# Altium PCB PCB1.PcbDoc (part 1 of 2)
Units mm, origin at the board's own origin, x right, y up, seen from the top; angles counter-clockwise.
Board outline 25 x 30 mm, 2 copper layers (Top Layer, Bottom Layer); 264 components, 8 nets, 720 pads, 0 vias.
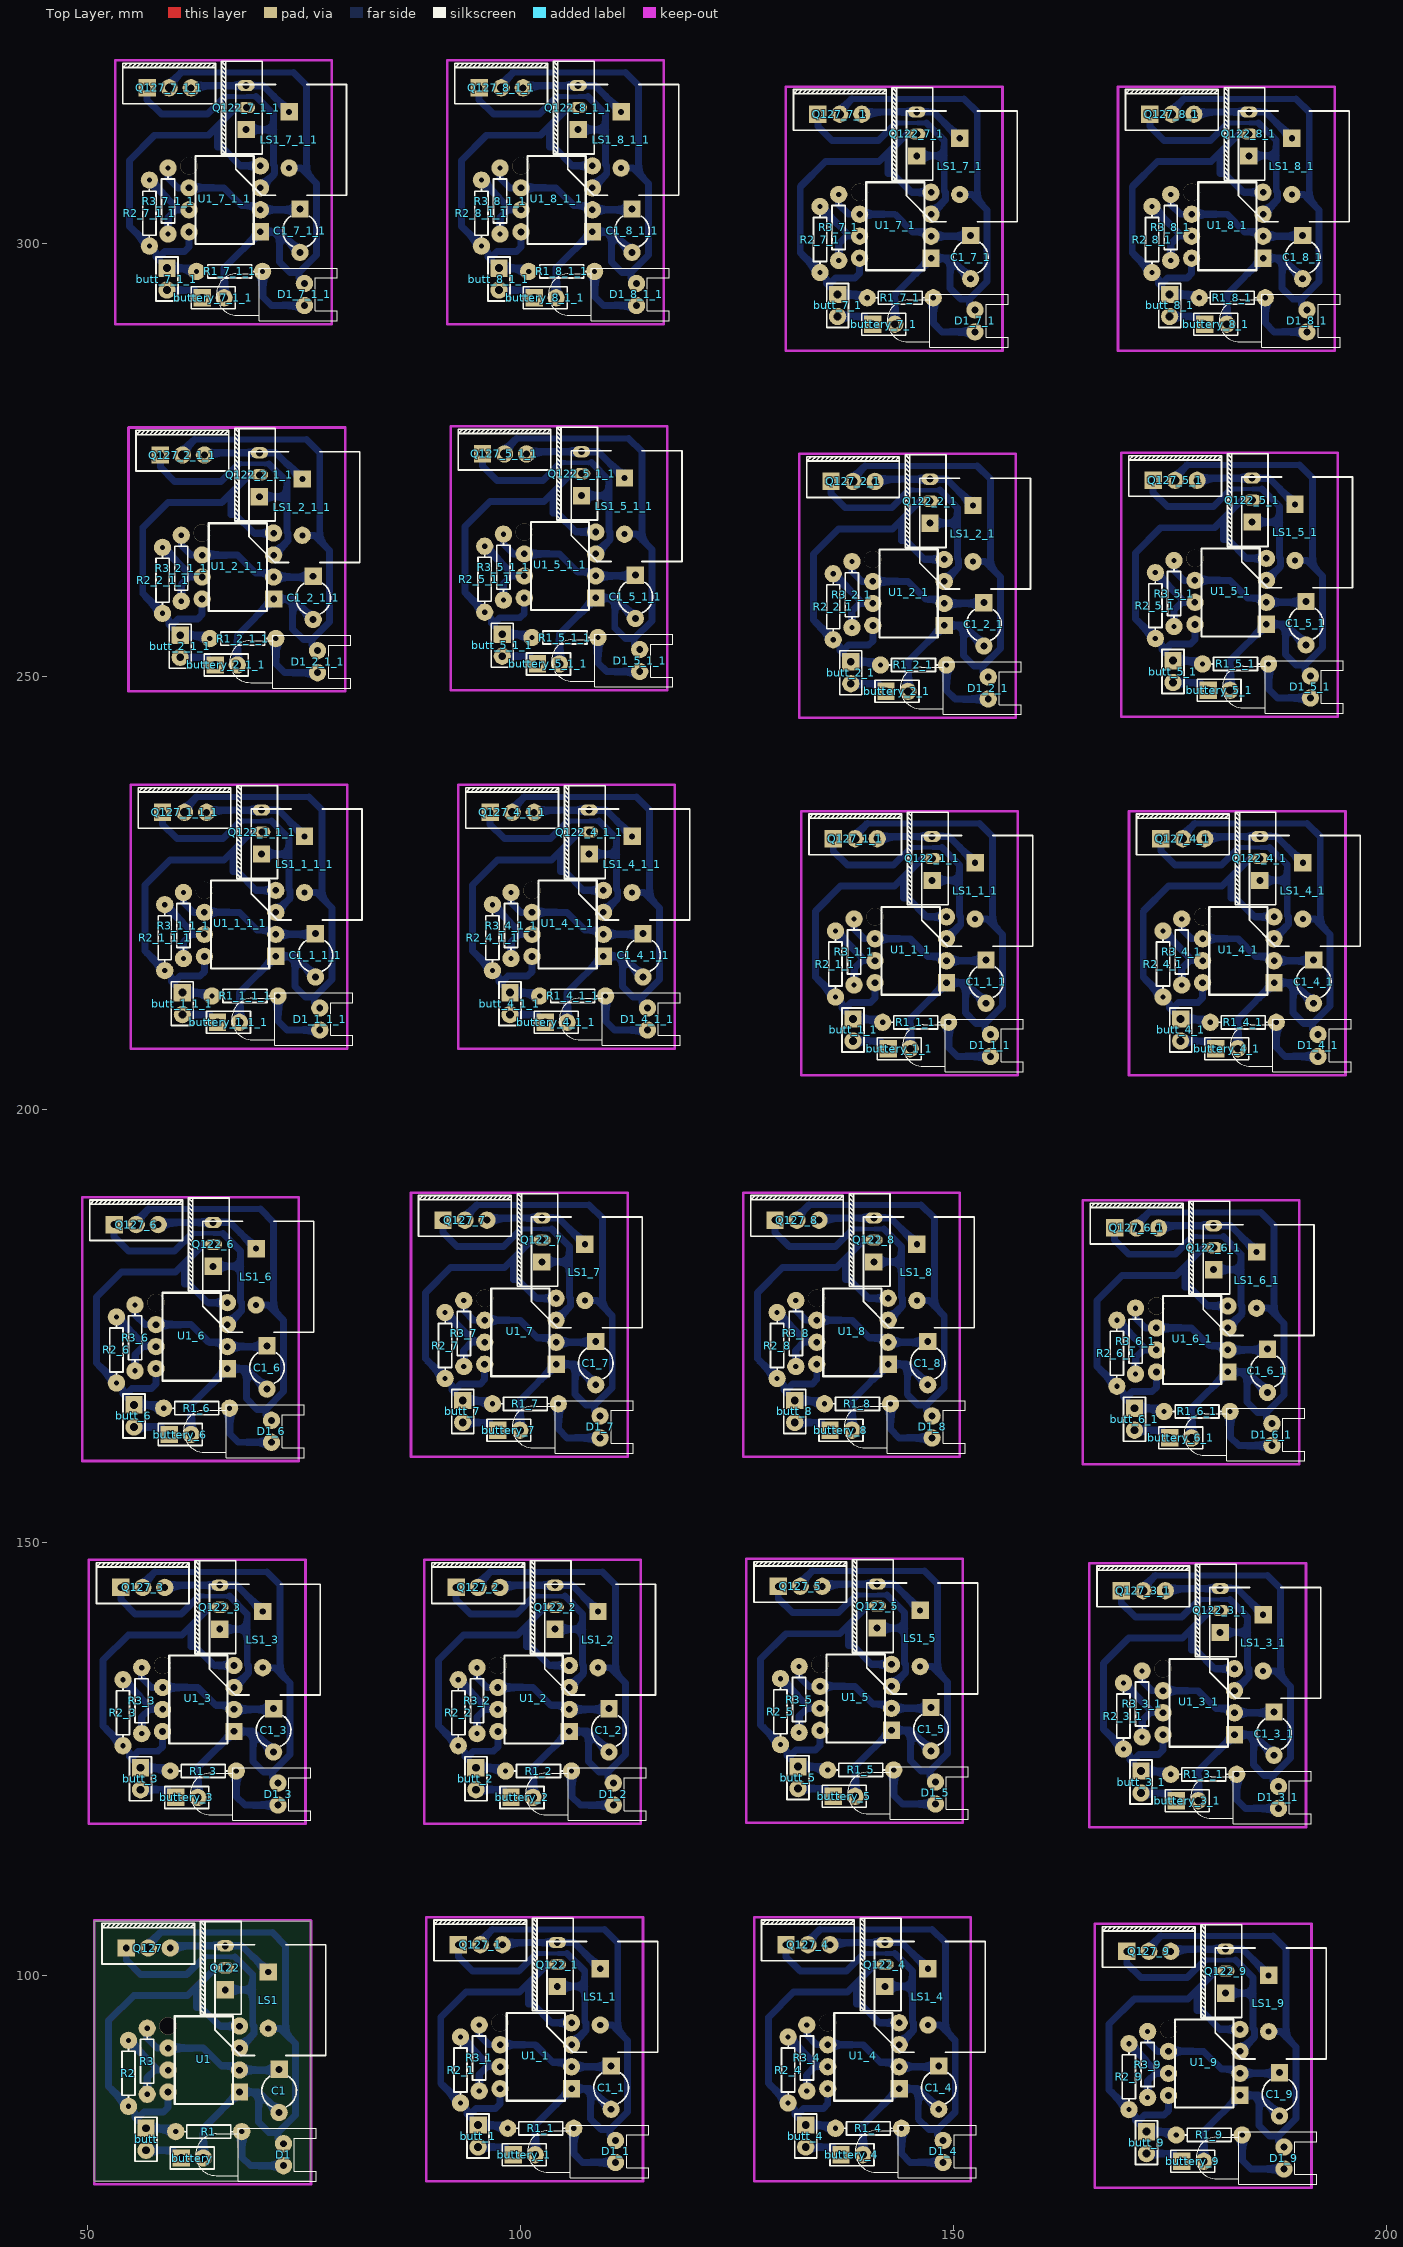
[diagram p0: Top Layer view]
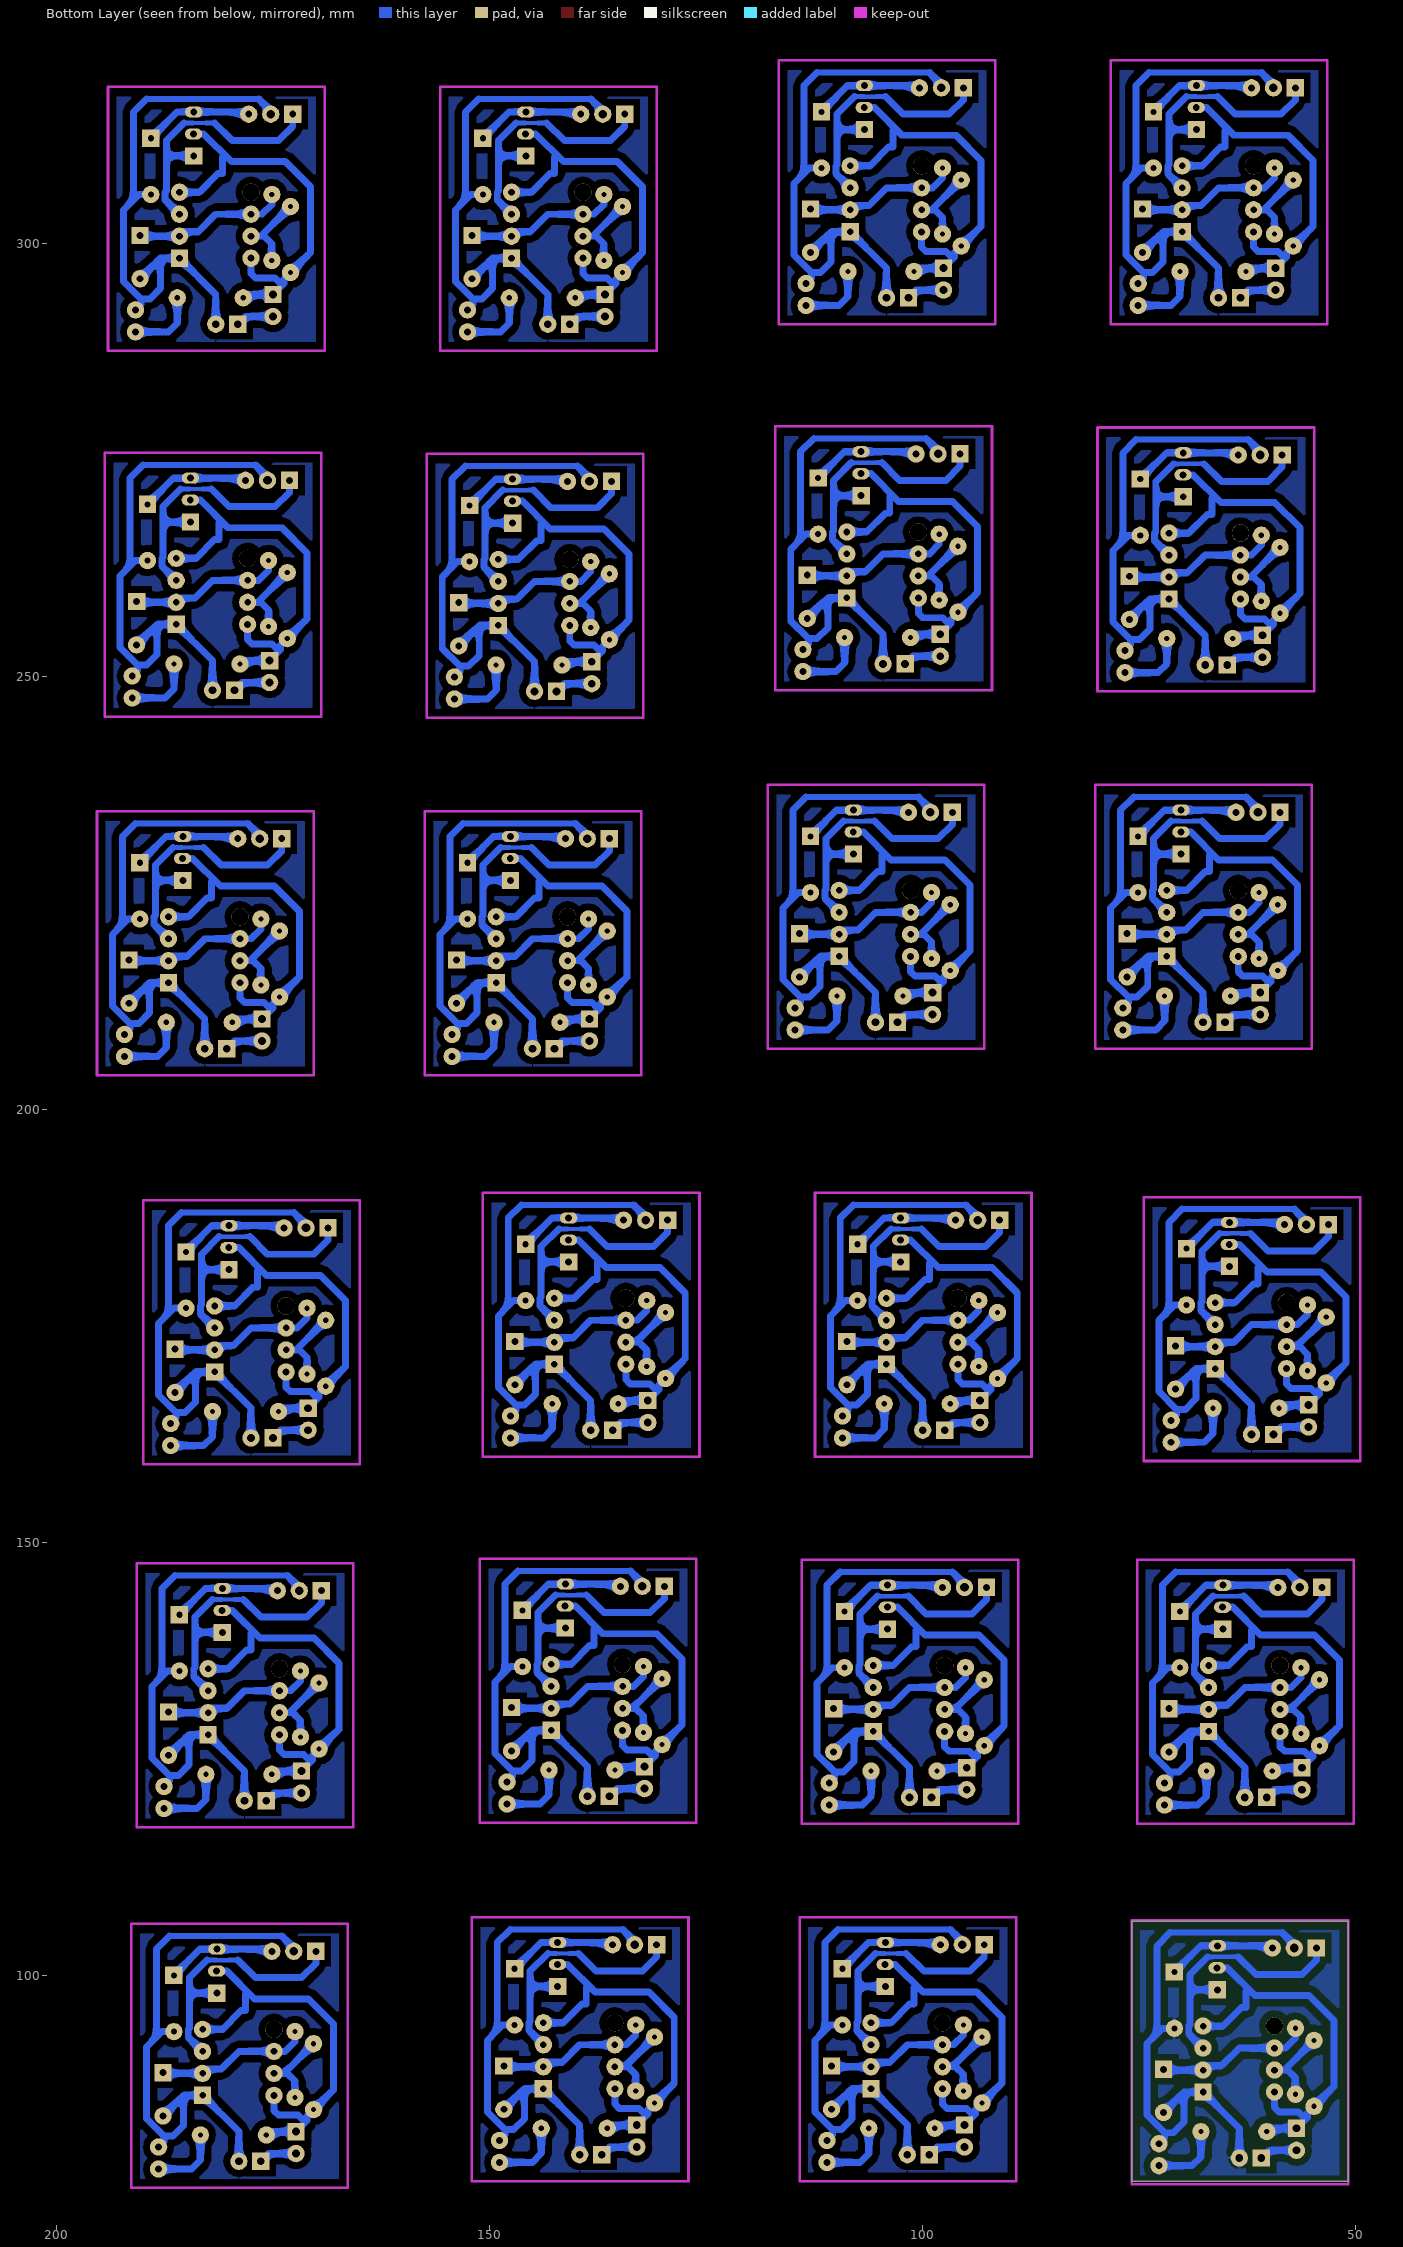
[diagram p1: Bottom Layer view, seen from below]

## Layer stack, top to bottom
Top Solder: solder mask 0.0102, Solder Resist, Dk 3.5
Top Layer: signal copper 0.0356
Dielectric 1: dielectric 0.32, FR-4, Dk 4.8
Bottom Layer: signal copper 0.0356
Bottom Solder: solder mask 0.0102, Solder Resist, Dk 3.5

## Board outline
50.8,76.2 75.8,76.2 75.8,106.2 50.8,106.2

## Design rules (kind name [scope] priority, off if disabled: settings)
Clearance [All] p1: gap=0.8
PolygonConnect [All] p1: connectstyle=Relief reliefconductorwidth=0.254 reliefentries=4 polygonreliefangle="90 Angle" airgapwidth=0.254
RoomDefinition Sheet1 [InComponentClass('Sheet1')] p1: confinementstyle=ConfineIn formatcopy=TRUE lockcomponents=FALSE outline 0,0 50.8,0 50.8,25.4 0,25.4
RoutingVias [All] p1: holewidth=0.8 width=2 viastyle="Through Hole" minholewidth=0.711 minwidth=1.27 maxholewidth=0.711 maxwidth=1.27
SolderMaskExpansion [All] p1: expansion=0.102
UnpouredPolygon [All] p1: allowunpoured=FALSE
Width [All] p1: maxlimit=0.8 minlimit=0.8 preferedwidth=0.8
29 further rules are at their usual default settings.

## Classes and differential pairs
component class Sheet1: butt buttery C1 D1 LS1 Q122 Q127 R1 R2 R3 U1

## Components (designator, comment, footprint, x,y, rotation, side; value= is the part's Value field where it differs from the comment)
butt "Header 2" HDR1X2 56.769,82.296 r270 top
butt_1 "Header 2" HDR1X2 95.123,82.677 r270 top (schematic designator butt)
butt_1_1 "Header 2" HDR1X2 138.43,210.439 r270 top (schematic designator butt)
butt_1_1_1 "Header 2" HDR1X2 60.96,213.487 r270 top (schematic designator butt)
butt_2 "Header 2" HDR1X2 94.869,123.952 r270 top (schematic designator butt)
butt_2_1 "Header 2" HDR1X2 138.176,251.714 r270 top (schematic designator butt)
butt_2_1_1 "Header 2" HDR1X2 60.706,254.762 r270 top (schematic designator butt)
butt_3 "Header 2" HDR1X2 56.134,123.952 r270 top (schematic designator butt)
butt_3_1 "Header 2" HDR1X2 171.704,123.571 r270 top (schematic designator butt)
butt_4 "Header 2" HDR1X2 132.969,82.677 r270 top (schematic designator butt)
butt_4_1 "Header 2" HDR1X2 176.276,210.439 r270 top (schematic designator butt)
butt_4_1_1 "Header 2" HDR1X2 98.806,213.487 r270 top (schematic designator butt)
butt_5 "Header 2" HDR1X2 132.08,124.079 r270 top (schematic designator butt)
butt_5_1 "Header 2" HDR1X2 175.387,251.841 r270 top (schematic designator butt)
butt_5_1_1 "Header 2" HDR1X2 97.917,254.889 r270 top (schematic designator butt)
butt_6 "Header 2" HDR1X2 55.372,165.862 r270 top (schematic designator butt)
butt_6_1 "Header 2" HDR1X2 170.942,165.481 r270 top (schematic designator butt)
butt_7 "Header 2" HDR1X2 93.345,166.37 r270 top (schematic designator butt)
butt_7_1 "Header 2" HDR1X2 136.652,294.132 r270 top (schematic designator butt)
butt_7_1_1 "Header 2" HDR1X2 59.182,297.18 r270 top (schematic designator butt)
butt_8 "Header 2" HDR1X2 131.699,166.37 r270 top (schematic designator butt)
butt_8_1 "Header 2" HDR1X2 175.006,294.132 r270 top (schematic designator butt)
butt_8_1_1 "Header 2" HDR1X2 97.536,297.18 r270 top (schematic designator butt)
butt_9 "Header 2" HDR1X2 172.339,81.915 r270 top (schematic designator butt)
buttery "Header 2" HDR1X2 60.833,78.867 r0 top
buttery_1 "Header 2" HDR1X2 99.187,79.248 r0 top (schematic designator buttery)
buttery_1_1 "Header 2" HDR1X2 142.494,207.01 r0 top (schematic designator buttery)
buttery_1_1_1 "Header 2" HDR1X2 65.024,210.058 r0 top (schematic designator buttery)
buttery_2 "Header 2" HDR1X2 98.933,120.523 r0 top (schematic designator buttery)
buttery_2_1 "Header 2" HDR1X2 142.24,248.285 r0 top (schematic designator buttery)
buttery_2_1_1 "Header 2" HDR1X2 64.77,251.333 r0 top (schematic designator buttery)
buttery_3 "Header 2" HDR1X2 60.198,120.523 r0 top (schematic designator buttery)
buttery_3_1 "Header 2" HDR1X2 175.768,120.142 r0 top (schematic designator buttery)
buttery_4 "Header 2" HDR1X2 137.033,79.248 r0 top (schematic designator buttery)
buttery_4_1 "Header 2" HDR1X2 180.34,207.01 r0 top (schematic designator buttery)
buttery_4_1_1 "Header 2" HDR1X2 102.87,210.058 r0 top (schematic designator buttery)
buttery_5 "Header 2" HDR1X2 136.144,120.65 r0 top (schematic designator buttery)
buttery_5_1 "Header 2" HDR1X2 179.451,248.412 r0 top (schematic designator buttery)
buttery_5_1_1 "Header 2" HDR1X2 101.981,251.46 r0 top (schematic designator buttery)
buttery_6 "Header 2" HDR1X2 59.436,162.433 r0 top (schematic designator buttery)
buttery_6_1 "Header 2" HDR1X2 175.006,162.052 r0 top (schematic designator buttery)
buttery_7 "Header 2" HDR1X2 97.409,162.941 r0 top (schematic designator buttery)
buttery_7_1 "Header 2" HDR1X2 140.716,290.703 r0 top (schematic designator buttery)
buttery_7_1_1 "Header 2" HDR1X2 63.246,293.751 r0 top (schematic designator buttery)
buttery_8 "Header 2" HDR1X2 135.763,162.941 r0 top (schematic designator buttery)
buttery_8_1 "Header 2" HDR1X2 179.07,290.703 r0 top (schematic designator buttery)
buttery_8_1_1 "Header 2" HDR1X2 101.6,293.751 r0 top (schematic designator buttery)
buttery_9 "Header 2" HDR1X2 176.403,78.486 r0 top (schematic designator buttery)
C1 "Cap2" CAPR5-4X5 72.136,86.614 r270 top
C1_1 "Cap2" CAPR5-4X5 110.49,86.995 r270 top (schematic designator C1)
C1_1_1 "Cap2" CAPR5-4X5 153.797,214.757 r270 top (schematic designator C1)
C1_1_1_1 "Cap2" CAPR5-4X5 76.327,217.805 r270 top (schematic designator C1)
C1_2 "Cap2" CAPR5-4X5 110.236,128.27 r270 top (schematic designator C1)
C1_2_1 "Cap2" CAPR5-4X5 153.543,256.032 r270 top (schematic designator C1)
C1_2_1_1 "Cap2" CAPR5-4X5 76.073,259.08 r270 top (schematic designator C1)
C1_3 "Cap2" CAPR5-4X5 71.501,128.27 r270 top (schematic designator C1)
C1_3_1 "Cap2" CAPR5-4X5 187.071,127.889 r270 top (schematic designator C1)
C1_4 "Cap2" CAPR5-4X5 148.336,86.995 r270 top (schematic designator C1)
C1_4_1 "Cap2" CAPR5-4X5 191.643,214.757 r270 top (schematic designator C1)
C1_4_1_1 "Cap2" CAPR5-4X5 114.173,217.805 r270 top (schematic designator C1)
C1_5 "Cap2" CAPR5-4X5 147.447,128.397 r270 top (schematic designator C1)
C1_5_1 "Cap2" CAPR5-4X5 190.754,256.159 r270 top (schematic designator C1)
C1_5_1_1 "Cap2" CAPR5-4X5 113.284,259.207 r270 top (schematic designator C1)
C1_6 "Cap2" CAPR5-4X5 70.739,170.18 r270 top (schematic designator C1)
C1_6_1 "Cap2" CAPR5-4X5 186.309,169.799 r270 top (schematic designator C1)
C1_7 "Cap2" CAPR5-4X5 108.712,170.688 r270 top (schematic designator C1)
C1_7_1 "Cap2" CAPR5-4X5 152.019,298.45 r270 top (schematic designator C1)
C1_7_1_1 "Cap2" CAPR5-4X5 74.549,301.498 r270 top (schematic designator C1)
C1_8 "Cap2" CAPR5-4X5 147.066,170.688 r270 top (schematic designator C1)
C1_8_1 "Cap2" CAPR5-4X5 190.373,298.45 r270 top (schematic designator C1)
C1_8_1_1 "Cap2" CAPR5-4X5 112.903,301.498 r270 top (schematic designator C1)
C1_9 "Cap2" CAPR5-4X5 187.706,86.233 r270 top (schematic designator C1)
D1 "LED0" LED-0 72.644,79.248 r270 top
D1_1 "LED0" LED-0 110.998,79.629 r270 top (schematic designator D1)
D1_1_1 "LED0" LED-0 154.305,207.391 r270 top (schematic designator D1)
D1_1_1_1 "LED0" LED-0 76.835,210.439 r270 top (schematic designator D1)
D1_2 "LED0" LED-0 110.744,120.904 r270 top (schematic designator D1)
D1_2_1 "LED0" LED-0 154.051,248.666 r270 top (schematic designator D1)
D1_2_1_1 "LED0" LED-0 76.581,251.714 r270 top (schematic designator D1)
D1_3 "LED0" LED-0 72.009,120.904 r270 top (schematic designator D1)
D1_3_1 "LED0" LED-0 187.579,120.523 r270 top (schematic designator D1)
D1_4 "LED0" LED-0 148.844,79.629 r270 top (schematic designator D1)
D1_4_1 "LED0" LED-0 192.151,207.391 r270 top (schematic designator D1)
D1_4_1_1 "LED0" LED-0 114.681,210.439 r270 top (schematic designator D1)
D1_5 "LED0" LED-0 147.955,121.031 r270 top (schematic designator D1)
D1_5_1 "LED0" LED-0 191.262,248.793 r270 top (schematic designator D1)
D1_5_1_1 "LED0" LED-0 113.792,251.841 r270 top (schematic designator D1)
D1_6 "LED0" LED-0 71.247,162.814 r270 top (schematic designator D1)
D1_6_1 "LED0" LED-0 186.817,162.433 r270 top (schematic designator D1)
D1_7 "LED0" LED-0 109.22,163.322 r270 top (schematic designator D1)
D1_7_1 "LED0" LED-0 152.527,291.084 r270 top (schematic designator D1)
D1_7_1_1 "LED0" LED-0 75.057,294.132 r270 top (schematic designator D1)
D1_8 "LED0" LED-0 147.574,163.322 r270 top (schematic designator D1)
D1_8_1 "LED0" LED-0 190.881,291.084 r270 top (schematic designator D1)
D1_8_1_1 "LED0" LED-0 113.411,294.132 r270 top (schematic designator D1)
D1_9 "LED0" LED-0 188.214,78.867 r270 top (schematic designator D1)
LS1 "Buzzer" ABSM-1574 71.12,102.997 r270 top
LS1_1 "Buzzer" ABSM-1574 109.474,103.378 r270 top (schematic designator LS1)
LS1_1_1 "Buzzer" ABSM-1574 152.781,231.14 r270 top (schematic designator LS1)
LS1_1_1_1 "Buzzer" ABSM-1574 75.311,234.188 r270 top (schematic designator LS1)
LS1_2 "Buzzer" ABSM-1574 109.22,144.653 r270 top (schematic designator LS1)
LS1_2_1 "Buzzer" ABSM-1574 152.527,272.415 r270 top (schematic designator LS1)
LS1_2_1_1 "Buzzer" ABSM-1574 75.057,275.463 r270 top (schematic designator LS1)
LS1_3 "Buzzer" ABSM-1574 70.485,144.653 r270 top (schematic designator LS1)
LS1_3_1 "Buzzer" ABSM-1574 186.055,144.272 r270 top (schematic designator LS1)
LS1_4 "Buzzer" ABSM-1574 147.32,103.378 r270 top (schematic designator LS1)
LS1_4_1 "Buzzer" ABSM-1574 190.627,231.14 r270 top (schematic designator LS1)
LS1_4_1_1 "Buzzer" ABSM-1574 113.157,234.188 r270 top (schematic designator LS1)
LS1_5 "Buzzer" ABSM-1574 146.431,144.78 r270 top (schematic designator LS1)
LS1_5_1 "Buzzer" ABSM-1574 189.738,272.542 r270 top (schematic designator LS1)
LS1_5_1_1 "Buzzer" ABSM-1574 112.268,275.59 r270 top (schematic designator LS1)
LS1_6 "Buzzer" ABSM-1574 69.723,186.563 r270 top (schematic designator LS1)
LS1_6_1 "Buzzer" ABSM-1574 185.293,186.182 r270 top (schematic designator LS1)
LS1_7 "Buzzer" ABSM-1574 107.696,187.071 r270 top (schematic designator LS1)
LS1_7_1 "Buzzer" ABSM-1574 151.003,314.833 r270 top (schematic designator LS1)
LS1_7_1_1 "Buzzer" ABSM-1574 73.533,317.881 r270 top (schematic designator LS1)
LS1_8 "Buzzer" ABSM-1574 146.05,187.071 r270 top (schematic designator LS1)
LS1_8_1 "Buzzer" ABSM-1574 189.357,314.833 r270 top (schematic designator LS1)
LS1_8_1_1 "Buzzer" ABSM-1574 111.887,317.881 r270 top (schematic designator LS1)
LS1_9 "Buzzer" ABSM-1574 186.69,102.616 r270 top (schematic designator LS1)
Q122 "TIP122" TIP122 65.913,85.852 r90 top
Q122_1 "TIP122" TIP122 104.267,86.233 r90 top (schematic designator Q122)
Q122_1_1 "TIP122" TIP122 147.574,213.995 r90 top (schematic designator Q122)
Q122_1_1_1 "TIP122" TIP122 70.104,217.043 r90 top (schematic designator Q122)
Q122_2 "TIP122" TIP122 104.013,127.508 r90 top (schematic designator Q122)
Q122_2_1 "TIP122" TIP122 147.32,255.27 r90 top (schematic designator Q122)
Q122_2_1_1 "TIP122" TIP122 69.85,258.318 r90 top (schematic designator Q122)
Q122_3 "TIP122" TIP122 65.278,127.508 r90 top (schematic designator Q122)
Q122_3_1 "TIP122" TIP122 180.848,127.127 r90 top (schematic designator Q122)
Q122_4 "TIP122" TIP122 142.113,86.233 r90 top (schematic designator Q122)
Q122_4_1 "TIP122" TIP122 185.42,213.995 r90 top (schematic designator Q122)
Q122_4_1_1 "TIP122" TIP122 107.95,217.043 r90 top (schematic designator Q122)
Q122_5 "TIP122" TIP122 141.224,127.635 r90 top (schematic designator Q122)
Q122_5_1 "TIP122" TIP122 184.531,255.397 r90 top (schematic designator Q122)
Q122_5_1_1 "TIP122" TIP122 107.061,258.445 r90 top (schematic designator Q122)
Q122_6 "TIP122" TIP122 64.516,169.418 r90 top (schematic designator Q122)
Q122_6_1 "TIP122" TIP122 180.086,169.037 r90 top (schematic designator Q122)
Q122_7 "TIP122" TIP122 102.489,169.926 r90 top (schematic designator Q122)
Q122_7_1 "TIP122" TIP122 145.796,297.688 r90 top (schematic designator Q122)
Q122_7_1_1 "TIP122" TIP122 68.326,300.736 r90 top (schematic designator Q122)
Q122_8 "TIP122" TIP122 140.843,169.926 r90 top (schematic designator Q122)
Q122_8_1 "TIP122" TIP122 184.15,297.688 r90 top (schematic designator Q122)
Q122_8_1_1 "TIP122" TIP122 106.68,300.736 r90 top (schematic designator Q122)
Q122_9 "TIP122" TIP122 181.483,85.471 r90 top (schematic designator Q122)
Q127 "TIP127" TIP127 45.593,105.537 r0 top
Q127_1 "TIP127" TIP127 83.947,105.918 r0 top (schematic designator Q127)
Q127_1_1 "TIP127" TIP127 127.254,233.68 r0 top (schematic designator Q127)
Q127_1_1_1 "TIP127" TIP127 49.784,236.728 r0 top (schematic designator Q127)
Q127_2 "TIP127" TIP127 83.693,147.193 r0 top (schematic designator Q127)
Q127_2_1 "TIP127" TIP127 127,274.955 r0 top (schematic designator Q127)
Q127_2_1_1 "TIP127" TIP127 49.53,278.003 r0 top (schematic designator Q127)
Q127_3 "TIP127" TIP127 44.958,147.193 r0 top (schematic designator Q127)
Q127_3_1 "TIP127" TIP127 160.528,146.812 r0 top (schematic designator Q127)
Q127_4 "TIP127" TIP127 121.793,105.918 r0 top (schematic designator Q127)
Q127_4_1 "TIP127" TIP127 165.1,233.68 r0 top (schematic designator Q127)
Q127_4_1_1 "TIP127" TIP127 87.63,236.728 r0 top (schematic designator Q127)
Q127_5 "TIP127" TIP127 120.904,147.32 r0 top (schematic designator Q127)
Q127_5_1 "TIP127" TIP127 164.211,275.082 r0 top (schematic designator Q127)
Q127_5_1_1 "TIP127" TIP127 86.741,278.13 r0 top (schematic designator Q127)
Q127_6 "TIP127" TIP127 44.196,189.103 r0 top (schematic designator Q127)
Q127_6_1 "TIP127" TIP127 159.766,188.722 r0 top (schematic designator Q127)
Q127_7 "TIP127" TIP127 82.169,189.611 r0 top (schematic designator Q127)
Q127_7_1 "TIP127" TIP127 125.476,317.373 r0 top (schematic designator Q127)
Q127_7_1_1 "TIP127" TIP127 48.006,320.421 r0 top (schematic designator Q127)
Q127_8 "TIP127" TIP127 120.523,189.611 r0 top (schematic designator Q127)
Q127_8_1 "TIP127" TIP127 163.83,317.373 r0 top (schematic designator Q127)
Q127_8_1_1 "TIP127" TIP127 86.36,320.421 r0 top (schematic designator Q127)
Q127_9 "TIP127" TIP127 161.163,105.156 r0 top (schematic designator Q127)
R1 "Res1" AXIAL-0.3 64.008,81.915 r180 top
R1_1 "Res1" AXIAL-0.3 102.362,82.296 r180 top (schematic designator R1)
R1_1_1 "Res1" AXIAL-0.3 145.669,210.058 r180 top (schematic designator R1)
R1_1_1_1 "Res1" AXIAL-0.3 68.199,213.106 r180 top (schematic designator R1)
R1_2 "Res1" AXIAL-0.3 102.108,123.571 r180 top (schematic designator R1)
R1_2_1 "Res1" AXIAL-0.3 145.415,251.333 r180 top (schematic designator R1)
R1_2_1_1 "Res1" AXIAL-0.3 67.945,254.381 r180 top (schematic designator R1)
R1_3 "Res1" AXIAL-0.3 63.373,123.571 r180 top (schematic designator R1)
R1_3_1 "Res1" AXIAL-0.3 178.943,123.19 r180 top (schematic designator R1)
R1_4 "Res1" AXIAL-0.3 140.208,82.296 r180 top (schematic designator R1)
R1_4_1 "Res1" AXIAL-0.3 183.515,210.058 r180 top (schematic designator R1)
R1_4_1_1 "Res1" AXIAL-0.3 106.045,213.106 r180 top (schematic designator R1)
R1_5 "Res1" AXIAL-0.3 139.319,123.698 r180 top (schematic designator R1)
R1_5_1 "Res1" AXIAL-0.3 182.626,251.46 r180 top (schematic designator R1)
R1_5_1_1 "Res1" AXIAL-0.3 105.156,254.508 r180 top (schematic designator R1)
R1_6 "Res1" AXIAL-0.3 62.611,165.481 r180 top (schematic designator R1)
R1_6_1 "Res1" AXIAL-0.3 178.181,165.1 r180 top (schematic designator R1)
R1_7 "Res1" AXIAL-0.3 100.584,165.989 r180 top (schematic designator R1)
R1_7_1 "Res1" AXIAL-0.3 143.891,293.751 r180 top (schematic designator R1)
R1_7_1_1 "Res1" AXIAL-0.3 66.421,296.799 r180 top (schematic designator R1)
R1_8 "Res1" AXIAL-0.3 138.938,165.989 r180 top (schematic designator R1)
R1_8_1 "Res1" AXIAL-0.3 182.245,293.751 r180 top (schematic designator R1)
R1_8_1_1 "Res1" AXIAL-0.3 104.775,296.799 r180 top (schematic designator R1)
R1_9 "Res1" AXIAL-0.3 179.578,81.534 r180 top (schematic designator R1)
R2 "Res1" AXIAL-0.3 54.737,88.646 r90 top
R2_1 "Res1" AXIAL-0.3 93.091,89.027 r90 top (schematic designator R2)
R2_1_1 "Res1" AXIAL-0.3 136.398,216.789 r90 top (schematic designator R2)
R2_1_1_1 "Res1" AXIAL-0.3 58.928,219.837 r90 top (schematic designator R2)
R2_2 "Res1" AXIAL-0.3 92.837,130.302 r90 top (schematic designator R2)
R2_2_1 "Res1" AXIAL-0.3 136.144,258.064 r90 top (schematic designator R2)
R2_2_1_1 "Res1" AXIAL-0.3 58.674,261.112 r90 top (schematic designator R2)
R2_3 "Res1" AXIAL-0.3 54.102,130.302 r90 top (schematic designator R2)
R2_3_1 "Res1" AXIAL-0.3 169.672,129.921 r90 top (schematic designator R2)
R2_4 "Res1" AXIAL-0.3 130.937,89.027 r90 top (schematic designator R2)
R2_4_1 "Res1" AXIAL-0.3 174.244,216.789 r90 top (schematic designator R2)
R2_4_1_1 "Res1" AXIAL-0.3 96.774,219.837 r90 top (schematic designator R2)
R2_5 "Res1" AXIAL-0.3 130.048,130.429 r90 top (schematic designator R2)
R2_5_1 "Res1" AXIAL-0.3 173.355,258.191 r90 top (schematic designator R2)
R2_5_1_1 "Res1" AXIAL-0.3 95.885,261.239 r90 top (schematic designator R2)
R2_6 "Res1" AXIAL-0.3 53.34,172.212 r90 top (schematic designator R2)
R2_6_1 "Res1" AXIAL-0.3 168.91,171.831 r90 top (schematic designator R2)
R2_7 "Res1" AXIAL-0.3 91.313,172.72 r90 top (schematic designator R2)
R2_7_1 "Res1" AXIAL-0.3 134.62,300.482 r90 top (schematic designator R2)
R2_7_1_1 "Res1" AXIAL-0.3 57.15,303.53 r90 top (schematic designator R2)
R2_8 "Res1" AXIAL-0.3 129.667,172.72 r90 top (schematic designator R2)
R2_8_1 "Res1" AXIAL-0.3 172.974,300.482 r90 top (schematic designator R2)
R2_8_1_1 "Res1" AXIAL-0.3 95.504,303.53 r90 top (schematic designator R2)
R2_9 "Res1" AXIAL-0.3 170.307,88.265 r90 top (schematic designator R2)
R3 "Res1" AXIAL-0.3 56.896,90.043 r90 top
R3_1 "Res1" AXIAL-0.3 95.25,90.424 r90 top (schematic designator R3)
R3_1_1 "Res1" AXIAL-0.3 138.557,218.186 r90 top (schematic designator R3)
R3_1_1_1 "Res1" AXIAL-0.3 61.087,221.234 r90 top (schematic designator R3)
R3_2 "Res1" AXIAL-0.3 94.996,131.699 r90 top (schematic designator R3)
R3_2_1 "Res1" AXIAL-0.3 138.303,259.461 r90 top (schematic designator R3)
R3_2_1_1 "Res1" AXIAL-0.3 60.833,262.509 r90 top (schematic designator R3)
R3_3 "Res1" AXIAL-0.3 56.261,131.699 r90 top (schematic designator R3)
R3_3_1 "Res1" AXIAL-0.3 171.831,131.318 r90 top (schematic designator R3)
R3_4 "Res1" AXIAL-0.3 133.096,90.424 r90 top (schematic designator R3)
R3_4_1 "Res1" AXIAL-0.3 176.403,218.186 r90 top (schematic designator R3)
R3_4_1_1 "Res1" AXIAL-0.3 98.933,221.234 r90 top (schematic designator R3)
R3_5 "Res1" AXIAL-0.3 132.207,131.826 r90 top (schematic designator R3)
R3_5_1 "Res1" AXIAL-0.3 175.514,259.588 r90 top (schematic designator R3)
R3_5_1_1 "Res1" AXIAL-0.3 98.044,262.636 r90 top (schematic designator R3)
R3_6 "Res1" AXIAL-0.3 55.499,173.609 r90 top (schematic designator R3)
R3_6_1 "Res1" AXIAL-0.3 171.069,173.228 r90 top (schematic designator R3)
R3_7 "Res1" AXIAL-0.3 93.472,174.117 r90 top (schematic designator R3)
R3_7_1 "Res1" AXIAL-0.3 136.779,301.879 r90 top (schematic designator R3)
R3_7_1_1 "Res1" AXIAL-0.3 59.309,304.927 r90 top (schematic designator R3)
R3_8 "Res1" AXIAL-0.3 131.826,174.117 r90 top (schematic designator R3)
R3_8_1 "Res1" AXIAL-0.3 175.133,301.879 r90 top (schematic designator R3)
R3_8_1_1 "Res1" AXIAL-0.3 97.663,304.927 r90 top (schematic designator R3)
R3_9 "Res1" AXIAL-0.3 172.466,89.662 r90 top (schematic designator R3)
U1 "NE555" 555 66.929,84.963 r90 top
U1_1 "NE555" 555 105.283,85.344 r90 top (schematic designator U1)
U1_1_1 "NE555" 555 148.59,213.106 r90 top (schematic designator U1)
U1_1_1_1 "NE555" 555 71.12,216.154 r90 top (schematic designator U1)
U1_2 "NE555" 555 105.029,126.619 r90 top (schematic designator U1)
U1_2_1 "NE555" 555 148.336,254.381 r90 top (schematic designator U1)
U1_2_1_1 "NE555" 555 70.866,257.429 r90 top (schematic designator U1)
U1_3 "NE555" 555 66.294,126.619 r90 top (schematic designator U1)
U1_3_1 "NE555" 555 181.864,126.238 r90 top (schematic designator U1)
U1_4 "NE555" 555 143.129,85.344 r90 top (schematic designator U1)
U1_4_1 "NE555" 555 186.436,213.106 r90 top (schematic designator U1)
U1_4_1_1 "NE555" 555 108.966,216.154 r90 top (schematic designator U1)
U1_5 "NE555" 555 142.24,126.746 r90 top (schematic designator U1)
U1_5_1 "NE555" 555 185.547,254.508 r90 top (schematic designator U1)
U1_5_1_1 "NE555" 555 108.077,257.556 r90 top (schematic designator U1)
U1_6 "NE555" 555 65.532,168.529 r90 top (schematic designator U1)
U1_6_1 "NE555" 555 181.102,168.148 r90 top (schematic designator U1)
U1_7 "NE555" 555 103.505,169.037 r90 top (schematic designator U1)
U1_7_1 "NE555" 555 146.812,296.799 r90 top (schematic designator U1)
U1_7_1_1 "NE555" 555 69.342,299.847 r90 top (schematic designator U1)
U1_8 "NE555" 555 141.859,169.037 r90 top (schematic designator U1)
U1_8_1 "NE555" 555 185.166,296.799 r90 top (schematic designator U1)
U1_8_1_1 "NE555" 555 107.696,299.847 r90 top (schematic designator U1)
U1_9 "NE555" 555 182.499,84.582 r90 top (schematic designator U1)

## Footprints (in the part's own frame and the unit in brackets; to place one, negate y for a bottom-side part, rotate by r counter-clockwise, add the part's x,y. Pads: shape width x height; smd on the part's side, far side on the other; paste and mask are expansions set on the pad)
555 [mm]
  rect 2x2 hole 0.762: 1(1.524,-0.635)
  round 2 hole 0.762: 2(4.064,-0.635) 3(6.604,-0.635) 4(9.144,-0.635) 6(6.604,7.62) 7(4.064,7.62)
  round 2 hole 2: 5(9.144,7.62)
  round 2 hole 0.8: 8(1.524,7.62)
  silkscreen extent 0.13,0.13 10.29,6.86
ABSM-1574 [mm] "Magnetic Transducer Buzzer"
  rect 2x2 hole 0.7: 1A(2.65,-0.24)
  round 2 hole 0.7: 2A(9.15,-0.24)
  silkscreen extent -0.5,-6.4 12.3,6.4
AXIAL-0.3 [mm] "Axial Device, Thru-Hole; 2 Leads; 0.3 in Pin Spacing"
  round 2 hole 0.6: 1(-3.81,0) 2(3.81,0)
  silkscreen extent -2.77,-0.76 2.77,0.76
CAPR5-4X5 [mm] "Capacitor; 2 Leads"
  rect 2x2 hole 0.8: 1(-2.5,0)
  round 2 hole 0.8: 2(2.5,0)
  silkscreen extent -1.69,-2 1.82,2
HDR1X2 [mm] "Connector; Header; 2 Position"
  rect 2x2 hole 0.9: 1(0,0)
  round 2 hole 0.9: 2(2.54,0)
  silkscreen extent -1.27,-1.27 3.81,1.27
LED-0 [mm] "LED; 2 Leads"
  round 2 hole 0.8: 1(1.27,0) 2(-1.27,0)
  silkscreen extent -3.05,-10.16 3.05,3.81
TIP122 [mm]
  rect 2x2 hole 0.8: 1(12.446,0)
  oval 1.3x2 hole 0.8: 2(14.986,-0.023) 3(17.526,0)
  silkscreen extent 9.64,-1.85 20.34,2.85, body extent 9.91,-1.48 20.07,2.72, height 21.24
TIP127 [mm]
  rect 2x2 hole 0.8: 1(8.89,-2.413)
  round 2 hole 1: 2(11.43,-2.413)
  round 2 hole 0.8: 3(13.97,-2.413)
  silkscreen extent 6.08,-4.26 16.78,0.44, body extent 6.35,-3.89 16.51,0.3, height 21.24

## Part data
butt butt_1 butt_1_1 butt_1_1_1 butt_2 butt_2_1 butt_2_1_1 butt_3 butt_3_1 butt_4 butt_4_1 butt_4_1_1 butt_5 butt_5_1 butt_5_1_1 butt_6 butt_6_1 butt_7 butt_7_1 butt_7_1_1 butt_8 butt_8_1 butt_8_1_1 butt_9 buttery buttery_1 buttery_1_1 buttery_1_1_1 buttery_2 buttery_2_1 buttery_2_1_1 buttery_3 buttery_3_1 buttery_4 buttery_4_1 buttery_4_1_1 buttery_5 buttery_5_1 buttery_5_1_1 buttery_6 buttery_6_1 buttery_7 buttery_7_1 buttery_7_1_1 buttery_8 buttery_8_1 buttery_8_1_1 buttery_9: "Header, 2-Pin"
C1 C1_1 C1_1_1 C1_1_1_1 C1_2 C1_2_1 C1_2_1_1 C1_3 C1_3_1 C1_4 C1_4_1 C1_4_1_1 C1_5 C1_5_1 C1_5_1_1 C1_6 C1_6_1 C1_7 C1_7_1 C1_7_1_1 C1_8 C1_8_1 C1_8_1_1 C1_9: "Capacitor"
D1 D1_1 D1_1_1 D1_1_1_1 D1_2 D1_2_1 D1_2_1_1 D1_3 D1_3_1 D1_4 D1_4_1 D1_4_1_1 D1_5 D1_5_1 D1_5_1_1 D1_6 D1_6_1 D1_7 D1_7_1 D1_7_1_1 D1_8 D1_8_1 D1_8_1_1 D1_9: "Typical INFRARED GaAs LED"
LS1 LS1_1 LS1_1_1 LS1_1_1_1 LS1_2 LS1_2_1 LS1_2_1_1 LS1_3 LS1_3_1 LS1_4 LS1_4_1 LS1_4_1_1 LS1_5 LS1_5_1 LS1_5_1_1 LS1_6 LS1_6_1 LS1_7 LS1_7_1 LS1_7_1_1 LS1_8 LS1_8_1 LS1_8_1_1 LS1_9: "Magnetic Transducer Buzzer"
R1 R1_1 R1_1_1 R1_1_1_1 R1_2 R1_2_1 R1_2_1_1 R1_3 R1_3_1 R1_4 R1_4_1 R1_4_1_1 R1_5 R1_5_1 R1_5_1_1 R1_6 R1_6_1 R1_7 R1_7_1 R1_7_1_1 R1_8 R1_8_1 R1_8_1_1 R1_9 R2 R2_1 R2_1_1 R2_1_1_1 R2_2 R2_2_1 R2_2_1_1 R2_3 R2_3_1 R2_4 R2_4_1 R2_4_1_1 R2_5 R2_5_1 R2_5_1_1 R2_6 R2_6_1 R2_7 R2_7_1 R2_7_1_1 R2_8 R2_8_1 R2_8_1_1 R2_9 R3 R3_1 R3_1_1 R3_1_1_1 R3_2 R3_2_1 R3_2_1_1 R3_3 R3_3_1 R3_4 R3_4_1 R3_4_1_1 R3_5 R3_5_1 R3_5_1_1 R3_6 R3_6_1 R3_7 R3_7_1 R3_7_1_1 R3_8 R3_8_1 R3_8_1_1 R3_9: "Resistor"
U1 U1_1 U1_1_1 U1_1_1_1 U1_2 U1_2_1 U1_2_1_1 U1_3 U1_3_1 U1_4 U1_4_1 U1_4_1_1 U1_5 U1_5_1 U1_5_1_1 U1_6 U1_6_1 U1_7 U1_7_1 U1_7_1_1 U1_8 U1_8_1 U1_8_1_1 U1_9: library part 555

## Nets (pads, with @x,y where several pads share a name; then routed paths per layer and width w, separated by ;. In a path a pad name is that pad's centre, name@x,y a point inside that pad or via, vN(x,y) a via of type N, cw(c..) or ccw(c..) an arc to the next point about the centre after c; other vN are vias at no path point)
GND: buttery.2 C1.2 D1.2 LS1.2A Q127.2 U1.1 | length 65.3
  Bottom Layer w0.7: 58.42,104.902 71.374,104.902
  Bottom Layer w0.8: Q127.2@57.023,103.124 57.023,103.505 58.42,104.902 ; buttery.2@63.373,78.867 63.373,82.296 U1.1@67.564,86.487 69.763,86.487 ; LS1.2A@70.88,93.847 72.269,93.847 72.898,93.218 ; 71.374,104.902 72.898,103.378 72.898,93.218 ; C1.2@72.136,84.114 69.763,86.487 ; D1.2@72.644,80.518 72.009,81.153 72.009,81.788 ; 69.763,86.487 69.763,83.018 70.993,81.788 72.009,81.788 ; 72.009,81.788 74.041,83.82 74.041,92.075 72.898,93.218
Netbutt_1: butt.1 Q122.2 R1.2 R2.1 U1.4 U1.8 | length 47.6
  Bottom Layer w0.8: U1.8@59.309,86.487 59.309,84.709 58.801,84.201 56.515,84.201 55.88,83.566 55.499,83.566 ; R1.2@60.198,81.915 59.817,82.296 butt.1@56.769,82.296 55.499,83.566 ; 62.611,98.171 62.611,96.266 63.119,96.266 65.278,94.107 U1.4@67.564,94.107 ; Q122.2@65.936,100.838 64.77,100.838 61.572,97.64 55.349,97.64 52.451,94.742 52.451,87.122 R2.1@54.737,84.836 55.499,84.074 55.499,83.566
NetC1_1: C1.1 R3.2 U1.2 U1.6 | length 17.8
  Bottom Layer w0.8: R3.2@56.896,93.853 56.896,92.71 58.039,91.567 U1.6@59.309,91.567 63.373,91.567 65.405,89.535 67.056,89.535 U1.2@67.564,89.027 C1.1@72.049,89.027
NetD1_1: D1.1 R1.1 | length 8.2
  Bottom Layer w0.8: R1.1@67.818,81.915 67.818,78.994 68.834,77.978 D1.1@72.644,77.978
NetLS1_1: LS1.1A Q122.3 Q127.3 | length 12.7
  Bottom Layer w0.8: Q127.3@59.563,103.124 59.817,103.378 Q122.3@65.913,103.378 67.849,103.378 LS1.1A@70.88,100.347
NetR2_2: R2.2 R3.1 U1.7 | length 9.5
  Bottom Layer w0.8: R2.2@54.737,92.456 58.166,89.027 ; R3.1@56.896,86.233 56.896,88.138 57.785,89.027 58.166,89.027 ; U1.7@59.309,89.027 58.166,89.027
Q3: Q122.1 Q127.1 U1.3 | length 30.8
  Bottom Layer w0.5: 63.5,102.108 67.056,102.108
  Bottom Layer w0.8: Q127.1@54.483,103.124 54.483,101.727 56.134,100.076 61.468,100.076 63.5,102.108 ; Q122.1@65.913,98.298 69.088,98.298 ; 67.056,102.108 69.088,100.076 69.088,98.298 ; U1.3@67.564,91.567 69.215,93.218 69.215,94.107 69.088,94.234 69.088,98.298
VCC: butt.2 buttery.1 | length 4.4
  Bottom Layer w0.8: butt.2@56.769,79.756 59.944,79.756 buttery.1@60.833,78.867
pads on no net: butt_1.1 butt_1.2 butt_1_1.1 butt_1_1.2 butt_1_1_1.1 butt_1_1_1.2 butt_2.1 butt_2.2 butt_2_1.1 butt_2_1.2 butt_2_1_1.1 butt_2_1_1.2 butt_3.1 butt_3.2 butt_3_1.1 butt_3_1.2 butt_4.1 butt_4.2 butt_4_1.1 butt_4_1.2 butt_4_1_1.1 butt_4_1_1.2 butt_5.1 butt_5.2 butt_5_1.1 butt_5_1.2 butt_5_1_1.1 butt_5_1_1.2 butt_6.1 butt_6.2 butt_6_1.1 butt_6_1.2 butt_7.1 butt_7.2 butt_7_1.1 butt_7_1.2 butt_7_1_1.1 butt_7_1_1.2 butt_8.1 butt_8.2 butt_8_1.1 butt_8_1.2 butt_8_1_1.1 butt_8_1_1.2 butt_9.1 butt_9.2 buttery_1.1 buttery_1.2 buttery_1_1.1 buttery_1_1.2 buttery_1_1_1.1 buttery_1_1_1.2 buttery_2.1 buttery_2.2 buttery_2_1.1 buttery_2_1.2 buttery_2_1_1.1 buttery_2_1_1.2 buttery_3.1 buttery_3.2 buttery_3_1.1 buttery_3_1.2 buttery_4.1 buttery_4.2 buttery_4_1.1 buttery_4_1.2 buttery_4_1_1.1 buttery_4_1_1.2 buttery_5.1 buttery_5.2 buttery_5_1.1 buttery_5_1.2 buttery_5_1_1.1 buttery_5_1_1.2 buttery_6.1 buttery_6.2 buttery_6_1.1 buttery_6_1.2 buttery_7.1 buttery_7.2 buttery_7_1.1 buttery_7_1.2 buttery_7_1_1.1 buttery_7_1_1.2 buttery_8.1 buttery_8.2 buttery_8_1.1 buttery_8_1.2 buttery_8_1_1.1 buttery_8_1_1.2 buttery_9.1 buttery_9.2 C1_1.1 C1_1.2 C1_1_1.1 C1_1_1.2 C1_1_1_1.1 C1_1_1_1.2 C1_2.1 C1_2.2 C1_2_1.1 C1_2_1.2 C1_2_1_1.1 C1_2_1_1.2 C1_3.1 C1_3.2 C1_3_1.1 C1_3_1.2 C1_4.1 C1_4.2 C1_4_1.1 C1_4_1.2 C1_4_1_1.1 C1_4_1_1.2 C1_5.1 C1_5.2 C1_5_1.1 C1_5_1.2 C1_5_1_1.1 C1_5_1_1.2 C1_6.1 C1_6.2 C1_6_1.1 C1_6_1.2 C1_7.1 C1_7.2 C1_7_1.1 C1_7_1.2 C1_7_1_1.1 C1_7_1_1.2 C1_8.1 C1_8.2 C1_8_1.1 C1_8_1.2 C1_8_1_1.1 C1_8_1_1.2 C1_9.1 C1_9.2 D1_1.1 D1_1.2 D1_1_1.1 D1_1_1.2 D1_1_1_1.1 D1_1_1_1.2 D1_2.1 D1_2.2 D1_2_1.1 D1_2_1.2 D1_2_1_1.1 D1_2_1_1.2 D1_3.1 D1_3.2 D1_3_1.1 D1_3_1.2 D1_4.1 D1_4.2 D1_4_1.1 D1_4_1.2 D1_4_1_1.1 D1_4_1_1.2 D1_5.1 D1_5.2 D1_5_1.1 D1_5_1.2 D1_5_1_1.1 D1_5_1_1.2 D1_6.1 D1_6.2 D1_6_1.1 D1_6_1.2 D1_7.1 D1_7.2 D1_7_1.1 D1_7_1.2 D1_7_1_1.1 D1_7_1_1.2 D1_8.1 D1_8.2 D1_8_1.1 D1_8_1.2 D1_8_1_1.1 D1_8_1_1.2 D1_9.1 D1_9.2 LS1_1.1A LS1_1.2A LS1_1_1.1A LS1_1_1.2A LS1_1_1_1.1A LS1_1_1_1.2A LS1_2.1A LS1_2.2A LS1_2_1.1A LS1_2_1.2A LS1_2_1_1.1A LS1_2_1_1.2A LS1_3.1A LS1_3.2A LS1_3_1.1A LS1_3_1.2A LS1_4.1A LS1_4.2A LS1_4_1.1A LS1_4_1.2A LS1_4_1_1.1A LS1_4_1_1.2A LS1_5.1A LS1_5.2A LS1_5_1.1A LS1_5_1.2A LS1_5_1_1.1A LS1_5_1_1.2A LS1_6.1A LS1_6.2A LS1_6_1.1A LS1_6_1.2A LS1_7.1A LS1_7.2A LS1_7_1.1A LS1_7_1.2A LS1_7_1_1.1A LS1_7_1_1.2A LS1_8.1A LS1_8.2A LS1_8_1.1A LS1_8_1.2A LS1_8_1_1.1A LS1_8_1_1.2A LS1_9.1A LS1_9.2A Q122_1.1 Q122_1.2 Q122_1.3 Q122_1_1.1 Q122_1_1.2 Q122_1_1.3 Q122_1_1_1.1 Q122_1_1_1.2 Q122_1_1_1.3 Q122_2.1 Q122_2.2 Q122_2.3 Q122_2_1.1 Q122_2_1.2 Q122_2_1.3 Q122_2_1_1.1 Q122_2_1_1.2 Q122_2_1_1.3 Q122_3.1 Q122_3.2 Q122_3.3 Q122_3_1.1 Q122_3_1.2 Q122_3_1.3 Q122_4.1 Q122_4.2 Q122_4.3 Q122_4_1.1 Q122_4_1.2 Q122_4_1.3 Q122_4_1_1.1 Q122_4_1_1.2 Q122_4_1_1.3 Q122_5.1 Q122_5.2 Q122_5.3 Q122_5_1.1 Q122_5_1.2 Q122_5_1.3 Q122_5_1_1.1 Q122_5_1_1.2 Q122_5_1_1.3 Q122_6.1 Q122_6.2 Q122_6.3 Q122_6_1.1 Q122_6_1.2 Q122_6_1.3 Q122_7.1 Q122_7.2 Q122_7.3 Q122_7_1.1 Q122_7_1.2 Q122_7_1.3 Q122_7_1_1.1 Q122_7_1_1.2 Q122_7_1_1.3 Q122_8.1 Q122_8.2 Q122_8.3 Q122_8_1.1 Q122_8_1.2 Q122_8_1.3 Q122_8_1_1.1 Q122_8_1_1.2 Q122_8_1_1.3 Q122_9.1 Q122_9.2 Q122_9.3 Q127_1.1 Q127_1.2 Q127_1.3 Q127_1_1.1 Q127_1_1.2 Q127_1_1.3 Q127_1_1_1.1 Q127_1_1_1.2 Q127_1_1_1.3 Q127_2.1 Q127_2.2 Q127_2.3 Q127_2_1.1 Q127_2_1.2 Q127_2_1.3 Q127_2_1_1.1 Q127_2_1_1.2 Q127_2_1_1.3 Q127_3.1 Q127_3.2 Q127_3.3 Q127_3_1.1 Q127_3_1.2 Q127_3_1.3 Q127_4.1 Q127_4.2 Q127_4.3 Q127_4_1.1 Q127_4_1.2 Q127_4_1.3 Q127_4_1_1.1 Q127_4_1_1.2 Q127_4_1_1.3 Q127_5.1 Q127_5.2 Q127_5.3 Q127_5_1.1 Q127_5_1.2 Q127_5_1.3 Q127_5_1_1.1 Q127_5_1_1.2 Q127_5_1_1.3 Q127_6.1 Q127_6.2 Q127_6.3 Q127_6_1.1 Q127_6_1.2 Q127_6_1.3 Q127_7.1 Q127_7.2 Q127_7.3 Q127_7_1.1 Q127_7_1.2 Q127_7_1.3 Q127_7_1_1.1 Q127_7_1_1.2 Q127_7_1_1.3 Q127_8.1 Q127_8.2 Q127_8.3 Q127_8_1.1 Q127_8_1.2 Q127_8_1.3 Q127_8_1_1.1 Q127_8_1_1.2 Q127_8_1_1.3 Q127_9.1 Q127_9.2 Q127_9.3 R1_1.1 R1_1.2 R1_1_1.1 R1_1_1.2 R1_1_1_1.1 R1_1_1_1.2 R1_2.1 R1_2.2 R1_2_1.1 R1_2_1.2 R1_2_1_1.1 R1_2_1_1.2 R1_3.1 R1_3.2 R1_3_1.1 R1_3_1.2 R1_4.1 R1_4.2 R1_4_1.1 R1_4_1.2 R1_4_1_1.1 R1_4_1_1.2 R1_5.1 R1_5.2 R1_5_1.1 R1_5_1.2 R1_5_1_1.1 R1_5_1_1.2 R1_6.1 R1_6.2 R1_6_1.1 R1_6_1.2 R1_7.1 R1_7.2 R1_7_1.1 R1_7_1.2 R1_7_1_1.1 R1_7_1_1.2 R1_8.1 R1_8.2 R1_8_1.1 R1_8_1.2 R1_8_1_1.1 R1_8_1_1.2 R1_9.1 R1_9.2 R2_1.1 R2_1.2 R2_1_1.1 R2_1_1.2 R2_1_1_1.1 R2_1_1_1.2 R2_2.1 R2_2.2 R2_2_1.1 R2_2_1.2 R2_2_1_1.1 R2_2_1_1.2 R2_3.1 R2_3.2 R2_3_1.1 R2_3_1.2 R2_4.1 R2_4.2 R2_4_1.1 R2_4_1.2 R2_4_1_1.1 R2_4_1_1.2 R2_5.1 R2_5.2 R2_5_1.1 R2_5_1.2 R2_5_1_1.1 R2_5_1_1.2 R2_6.1 R2_6.2 R2_6_1.1 R2_6_1.2 R2_7.1 R2_7.2 R2_7_1.1 R2_7_1.2 R2_7_1_1.1 R2_7_1_1.2 R2_8.1 R2_8.2 R2_8_1.1 R2_8_1.2 R2_8_1_1.1 R2_8_1_1.2 R2_9.1 R2_9.2 R3_1.1 R3_1.2 R3_1_1.1 R3_1_1.2 R3_1_1_1.1 R3_1_1_1.2 R3_2.1 R3_2.2 R3_2_1.1 R3_2_1.2 R3_2_1_1.1 R3_2_1_1.2 R3_3.1 R3_3.2 R3_3_1.1 R3_3_1.2 R3_4.1 R3_4.2 R3_4_1.1 R3_4_1.2 R3_4_1_1.1 R3_4_1_1.2 R3_5.1 R3_5.2 R3_5_1.1 R3_5_1.2 R3_5_1_1.1 R3_5_1_1.2 R3_6.1 R3_6.2 R3_6_1.1 R3_6_1.2 R3_7.1 R3_7.2 R3_7_1.1 R3_7_1.2 R3_7_1_1.1 R3_7_1_1.2 R3_8.1 R3_8.2 R3_8_1.1 R3_8_1.2 R3_8_1_1.1 R3_8_1_1.2 R3_9.1 R3_9.2 U1.5 U1_1.1 U1_1.2 U1_1.3 U1_1.4 U1_1.5 U1_1.6 U1_1.7 U1_1.8 U1_1_1.1 U1_1_1.2 U1_1_1.3 U1_1_1.4 U1_1_1.5 U1_1_1.6 U1_1_1.7 U1_1_1.8 U1_1_1_1.1 U1_1_1_1.2 U1_1_1_1.3 U1_1_1_1.4 U1_1_1_1.5 U1_1_1_1.6 U1_1_1_1.7 U1_1_1_1.8 U1_2.1 U1_2.2 U1_2.3 U1_2.4 U1_2.5 U1_2.6 U1_2.7 U1_2.8 U1_2_1.1 U1_2_1.2 U1_2_1.3 U1_2_1.4 U1_2_1.5 U1_2_1.6 U1_2_1.7 U1_2_1.8 U1_2_1_1.1 U1_2_1_1.2 U1_2_1_1.3 U1_2_1_1.4 U1_2_1_1.5 U1_2_1_1.6 U1_2_1_1.7 U1_2_1_1.8 U1_3.1 U1_3.2 U1_3.3 U1_3.4 U1_3.5 U1_3.6 U1_3.7 U1_3.8 U1_3_1.1 U1_3_1.2 U1_3_1.3 U1_3_1.4 U1_3_1.5 U1_3_1.6 U1_3_1.7 U1_3_1.8 U1_4.1 U1_4.2 U1_4.3 U1_4.4 U1_4.5 U1_4.6 U1_4.7 U1_4.8 U1_4_1.1 U1_4_1.2 U1_4_1.3 U1_4_1.4 U1_4_1.5 U1_4_1.6 U1_4_1.7 U1_4_1.8 U1_4_1_1.1 U1_4_1_1.2 U1_4_1_1.3 U1_4_1_1.4 U1_4_1_1.5 U1_4_1_1.6 U1_4_1_1.7 U1_4_1_1.8 U1_5.1 U1_5.2 U1_5.3 U1_5.4 U1_5.5 U1_5.6 U1_5.7 U1_5.8 U1_5_1.1 U1_5_1.2 U1_5_1.3 U1_5_1.4 U1_5_1.5 U1_5_1.6 U1_5_1.7 U1_5_1.8 U1_5_1_1.1 U1_5_1_1.2 U1_5_1_1.3 U1_5_1_1.4 U1_5_1_1.5 U1_5_1_1.6 U1_5_1_1.7 U1_5_1_1.8 U1_6.1 U1_6.2 U1_6.3 U1_6.4 U1_6.5 U1_6.6 U1_6.7 U1_6.8 U1_6_1.1 U1_6_1.2 U1_6_1.3 U1_6_1.4 U1_6_1.5 U1_6_1.6 U1_6_1.7 U1_6_1.8 U1_7.1 U1_7.2 U1_7.3 U1_7.4 U1_7.5 U1_7.6 U1_7.7 U1_7.8 U1_7_1.1 U1_7_1.2 U1_7_1.3 U1_7_1.4 U1_7_1.5 U1_7_1.6 U1_7_1.7 U1_7_1.8 U1_7_1_1.1 U1_7_1_1.2 U1_7_1_1.3 U1_7_1_1.4 U1_7_1_1.5 U1_7_1_1.6 U1_7_1_1.7 U1_7_1_1.8 U1_8.1 U1_8.2 U1_8.3 U1_8.4 U1_8.5 U1_8.6 U1_8.7 U1_8.8 U1_8_1.1 U1_8_1.2 U1_8_1.3 U1_8_1.4 U1_8_1.5 U1_8_1.6 U1_8_1.7 U1_8_1.8 U1_8_1_1.1 U1_8_1_1.2 U1_8_1_1.3 U1_8_1_1.4 U1_8_1_1.5 U1_8_1_1.6 U1_8_1_1.7 U1_8_1_1.8 U1_9.1 U1_9.2 U1_9.3 U1_9.4 U1_9.5 U1_9.6 U1_9.7 U1_9.8